# Altium PCB TB6600_Base.PcbDoc (part 3 of 4)
Units mm, origin at the board's own origin, x right, y up, seen from the top; angles counter-clockwise.
Board outline 300 x 300 mm, 2 copper layers (Top Layer, Bottom Layer); 129 components, 65 nets, 411 pads, 153 vias.
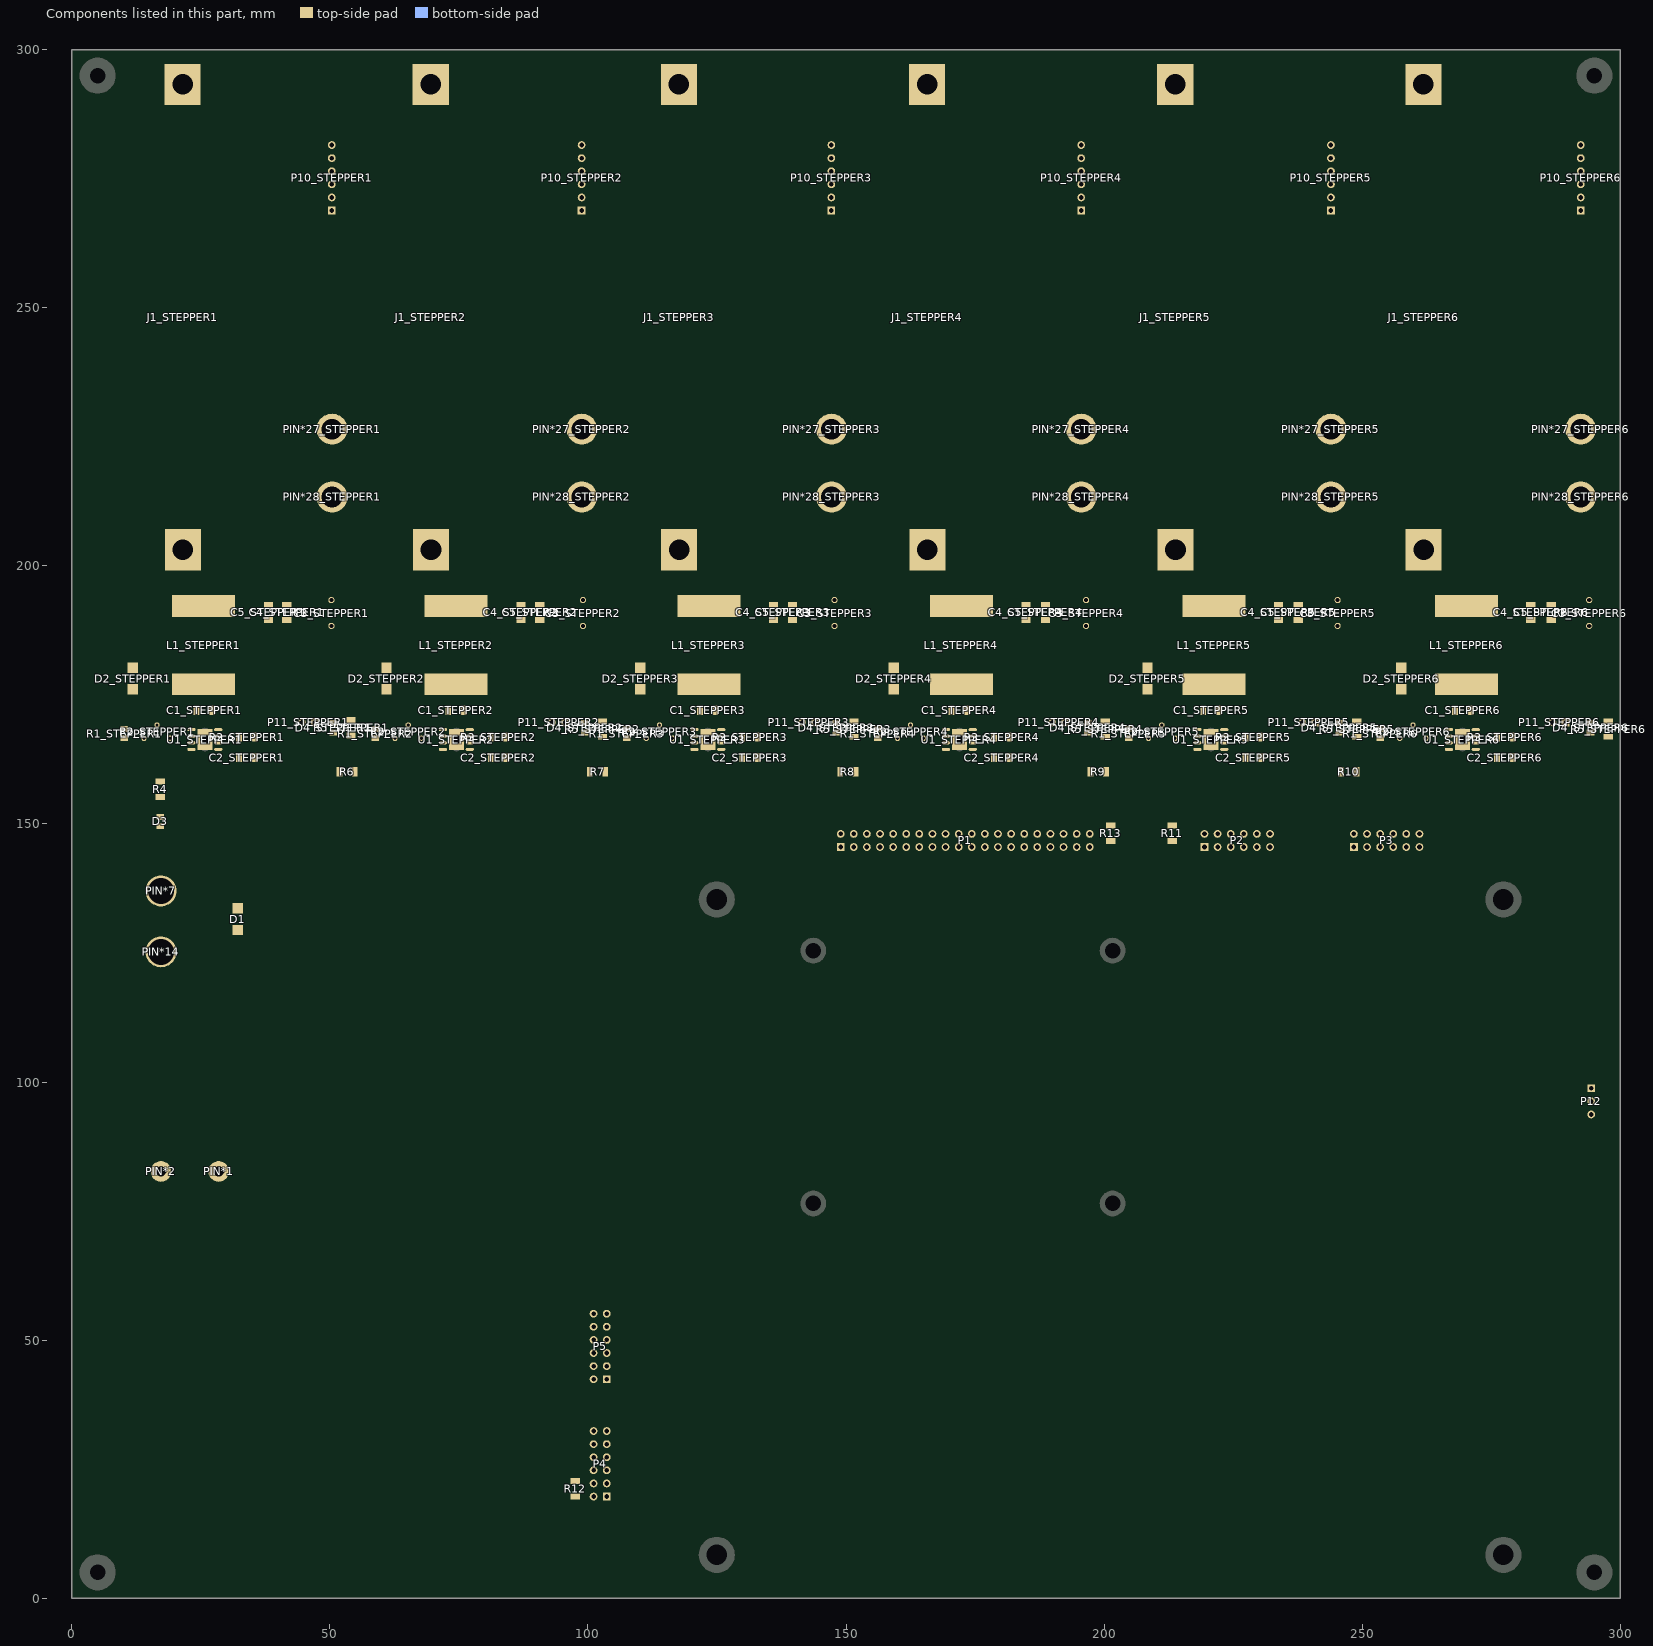
[diagram p3: the components of this part, seen from the top]

## Via types
v1: diameter 0.65, hole 0.3, Top Layer to Bottom Layer, tented both sides, 153 vias

## Nets (pads, with @x,y where several pads share a name; then routed paths per layer and width w, separated by ;. In a path a pad name is that pad's centre, name@x,y a point inside that pad or via, vN(x,y) a via of type N, cw(c..) or ccw(c..) an arc to the next point about the centre after c; other vN are vias at no path point) (continued)
copper on no net: (continued)
  Top Layer w0.254: 210.862,26.67 211.201,26.67 ; 210.862,26.924 211.201,26.924 ; 210.862,27.178 211.201,27.178 ; 210.862,27.432 210.947,27.432 ; 210.862,27.686 210.947,27.686 ; 210.862,27.94 210.947,27.94 ; 210.862,28.194 210.947,28.194 ; 210.862,28.448 210.947,28.448 ; 210.862,28.702 210.947,28.702 ; 210.862,28.956 210.947,28.956 ; 210.862,29.21 210.947,29.21 ; 210.862,29.464 210.947,29.464 ; 210.862,29.718 210.947,29.718 ; 210.862,29.972 210.947,29.972 ; 210.862,30.226 210.947,30.226 ; 210.862,30.48 210.947,30.48 ; 210.862,30.734 210.947,30.734 ; 210.862,30.988 210.947,30.988 ; 210.862,31.242 210.947,31.242 ; 210.862,31.496 210.947,31.496 ; 210.862,31.75 210.947,31.75 ; 210.862,32.004 210.947,32.004 ; 210.862,32.258 210.947,32.258 ; 210.862,32.512 210.947,32.512 ; 210.862,32.766 211.201,32.766 ; 210.862,33.02 211.201,33.02 ; 210.862,33.274 211.201,33.274 ; 211.116,25.146 211.455,25.146 ; 211.116,25.4 211.455,25.4 ; 211.116,25.654 211.201,25.654 ; 211.116,25.908 211.201,25.908 ; 211.116,26.162 211.201,26.162 ; 211.116,26.416 211.201,26.416 ; 211.116,33.528 211.201,33.528 ; 211.116,33.782 211.201,33.782 ; 211.116,34.036 211.201,34.036 ; 211.116,34.29 211.201,34.29 ; 211.116,34.544 211.455,34.544 ; 211.116,34.798 211.455,34.798 ; 211.116,35.052 211.455,35.052 ; 211.37,23.876 211.709,23.876 ; 211.37,24.13 211.709,24.13 ; 211.37,24.384 211.455,24.384 ; 211.37,24.638 211.455,24.638 ; 211.37,24.892 211.455,24.892 ; 211.37,35.306 211.455,35.306 ; 211.37,35.56 211.455,35.56 ; 211.37,35.814 211.455,35.814 ; 211.37,36.068 211.709,36.068 ; 211.37,36.322 211.709,36.322 ; 211.624,22.86 211.963,22.86 ; 211.624,23.114 211.963,23.114 ; 211.624,23.368 211.709,23.368 ; 211.624,23.622 211.709,23.622 ; 211.624,36.576 211.709,36.576 ; 211.624,36.83 211.709,36.83 ; 211.624,37.084 211.963,37.084 ; 211.624,37.338 211.963,37.338 ; 211.878,21.844 212.217,21.844 ; 211.878,22.098 212.217,22.098 ; 211.878,22.352 211.963,22.352 ; 211.878,22.606 211.963,22.606 ; 211.878,37.592 211.963,37.592 ; 211.878,37.846 211.963,37.846 ; 211.878,38.1 212.217,38.1 ; 212.132,21.082 212.471,21.082 ; 212.132,21.336 212.471,21.336 ; 212.132,21.59 212.217,21.59 ; 212.132,38.354 212.217,38.354 ; 212.132,38.608 212.217,38.608 ; 212.132,38.862 212.471,38.862 ; 212.386,20.574 212.725,20.574 ; 212.386,20.828 212.471,20.828 ; 212.386,39.116 212.471,39.116 ; 212.386,39.37 212.471,39.37 ; 212.386,39.624 212.725,39.624 ; 212.64,19.812 212.979,19.812 ; 212.64,20.066 212.725,20.066 ; 212.64,20.32 212.725,20.32 ; 212.64,29.718 212.979,29.718 ; 212.64,29.972 212.979,29.972 ; 212.64,30.226 212.725,30.226 ; 212.64,30.48 212.725,30.48 ; 212.64,30.734 212.725,30.734 ; 212.64,30.988 212.979,30.988 ; 212.64,31.242 213.233,31.242 ; 212.64,39.878 212.725,39.878 ; 212.64,40.132 212.979,40.132 ; 212.64,40.386 212.979,40.386 ; 212.894,19.05 213.233,19.05 ; 212.894,19.304 213.233,19.304 ; 212.894,19.558 212.979,19.558 ; 212.894,25.654 216.027,25.654 ; 212.894,25.908 216.027,25.908 ; 212.894,27.94 216.027,27.94 ; 212.894,29.464 215.773,29.464 ; 212.894,31.496 215.773,31.496 ; 212.894,33.274 213.487,33.274 ; 212.894,33.528 213.995,33.528 ; 212.894,35.306 213.741,35.306 ; 212.894,35.56 213.741,35.56 ; 212.894,40.64 212.979,40.64 ; 212.894,40.894 213.233,40.894 ; 213.148,18.542 213.487,18.542 ; 213.148,18.796 213.233,18.796 ; 213.148,28.194 214.757,28.194 ; 213.148,33.02 214.503,33.02 ; 213.148,41.148 213.233,41.148 ; 213.148,41.402 213.487,41.402 ; 213.402,18.034 213.741,18.034 ; 213.402,18.288 213.487,18.288 ; 213.402,24.638 214.503,24.638 ; 213.402,24.892 213.487,24.892 ; 213.402,29.21 215.773,29.21 ; 213.402,35.052 214.503,35.052 ; 213.402,41.656 213.487,41.656 ; 213.402,41.91 213.741,41.91 ; 213.402,42.164 213.741,42.164 ; 213.656,17.526 213.995,17.526 ; 213.656,17.78 213.741,17.78 ; 213.656,22.098 213.995,22.098 ; 213.656,22.352 214.503,22.352 ; 213.656,31.75 215.773,31.75 ; 213.656,35.814 214.757,35.814 ; 213.656,42.418 213.995,42.418 ; 213.656,42.672 213.995,42.672 ; 213.91,17.018 214.249,17.018 ; 213.91,17.272 213.995,17.272 ; 213.91,33.782 215.011,33.782 ; 213.91,42.926 214.249,42.926 ; 213.91,43.18 214.249,43.18 ; 214.164,16.51 214.503,16.51 ; 214.164,16.764 214.249,16.764 ; 214.164,21.082 214.503,21.082 ; 214.164,21.336 215.265,21.336 ; 214.164,22.606 214.757,22.606 ; 214.164,24.384 215.773,24.384 ; 214.164,32.766 215.519,32.766 ; 214.164,43.434 214.503,43.434 ; 214.418,16.256 214.757,16.256 ; 214.418,23.368 214.757,23.368 ; 214.418,23.622 214.757,23.622 ; 214.418,23.876 214.503,23.876 ; 214.418,24.13 214.503,24.13 ; 214.418,34.798 215.519,34.798 ; 214.418,43.688 214.503,43.688 ; 214.418,43.942 214.757,43.942 ; 214.672,15.748 215.011,15.748 ; 214.672,16.002 214.757,16.002 ; 214.672,22.86 215.265,22.86 ; 214.672,23.114 215.519,23.114 ; 214.672,26.162 214.757,26.162 ; 214.672,26.416 214.757,26.416 ; 214.672,26.67 214.757,26.67 ; 214.672,26.924 214.757,26.924 ; 214.672,27.178 214.757,27.178 ; 214.672,27.432 214.757,27.432 ; 214.672,27.686 214.757,27.686 ; 214.672,36.068 216.027,36.068 ; 214.672,44.196 214.757,44.196 ; 214.672,44.45 215.011,44.45 ; 214.926,15.24 215.265,15.24 ; 214.926,15.494 215.011,15.494 ; 214.926,19.05 215.519,19.05 ; 214.926,19.304 216.281,19.304 ; 214.926,21.59 215.773,21.59 ; 214.926,34.036 216.027,34.036 ; 214.926,44.704 215.265,44.704 ; 215.18,14.986 215.519,14.986 ; 215.18,19.558 215.519,19.558 ; 215.18,19.812 215.519,19.812 ; 215.18,28.194 215.265,28.194 ; 215.18,32.512 216.281,32.512 ; 215.18,44.958 215.265,44.958 ; 215.18,45.212 215.519,45.212 ; 215.434,14.478 215.773,14.478 ; 215.434,14.732 215.519,14.732 ; 215.434,20.066 215.773,20.066 ; 215.434,21.844 217.043,21.844 ; 215.434,23.368 216.027,23.368 ; 215.434,24.13 216.535,24.13 ; 215.434,34.544 216.027,34.544 ; 215.434,45.466 215.773,45.466 ; 215.688,14.224 216.027,14.224 ; 215.688,20.32 216.027,20.32 ; 215.688,20.574 216.027,20.574 ; 215.688,28.194 216.027,28.194 ; 215.688,34.29 216.027,34.29 ; 215.688,36.322 216.281,36.322 ; 215.688,45.72 215.773,45.72 ; 215.688,45.974 216.027,45.974 ; 215.942,13.716 216.281,13.716 ; 215.942,13.97 216.027,13.97 ; 215.942,19.558 216.789,19.558 ; 215.942,20.828 216.281,20.828 ; 215.942,23.622 216.535,23.622 ; 215.942,46.228 216.281,46.228 ; 216.196,13.462 216.535,13.462 ; 216.196,21.082 216.535,21.082 ; 216.196,22.098 217.043,22.098 ; 216.196,23.876 216.535,23.876 ; 216.196,46.482 216.281,46.482 ; 216.196,46.736 216.535,46.736 ; 216.45,13.208 216.789,13.208 ; 216.45,15.748 216.789,15.748 ; 216.45,19.812 217.551,19.812 ; 216.45,21.336 216.535,21.336 ; 216.45,21.59 216.789,21.59 ; 216.45,46.99 216.789,46.99 ; 216.704,12.954 216.789,12.954 ; 216.704,15.24 217.043,15.24 ; 216.704,15.494 216.789,15.494 ; 216.704,16.002 216.789,16.002 ; 216.704,16.256 217.043,16.256 ; 216.704,22.352 217.043,22.352 ; 216.704,47.244 217.043,47.244 ; 216.958,12.446 217.297,12.446 ; 216.958,12.7 217.043,12.7 ; 216.958,14.986 217.297,14.986 ; 216.958,16.51 217.297,16.51 ; 216.958,16.764 217.551,16.764 ; 216.958,47.498 217.043,47.498 ; 217.212,12.192 217.551,12.192 ; 217.212,14.732 218.567,14.732 ; 217.212,17.018 217.805,17.018 ; 217.212,20.066 217.805,20.066 ; 217.212,47.752 217.297,47.752 ; 217.212,48.006 217.551,48.006 ; 217.466,11.938 217.805,11.938 ; 217.466,17.272 218.059,17.272 ; 217.466,48.26 217.805,48.26 ; 217.72,11.684 218.059,11.684 ; 217.72,14.478 218.059,14.478 ; 217.72,20.32 217.805,20.32 ; 217.72,48.514 218.059,48.514 ; 217.974,11.176 218.313,11.176 ; 217.974,11.43 218.059,11.43 ; 217.974,17.526 218.313,17.526 ; 217.974,28.448 219.329,28.448 ; 217.974,28.702 219.329,28.702 ; 217.974,28.956 219.329,28.956 ; 217.974,29.21 219.329,29.21 ; 217.974,29.464 219.329,29.464 ; 217.974,29.718 219.329,29.718 ; 217.974,29.972 219.583,29.972 ; 217.974,30.226 219.583,30.226 ; 217.974,30.48 219.583,30.48 ; 217.974,30.734 219.583,30.734 ; 217.974,30.988 219.837,30.988 ; 217.974,31.242 219.837,31.242 ; 217.974,31.496 219.837,31.496 ; 217.974,31.75 219.837,31.75 ; 217.974,32.004 220.091,32.004 ; 217.974,48.768 218.313,48.768 ; 218.228,10.922 218.567,10.922 ; 218.228,17.78 218.567,17.78 ; 218.228,18.034 218.567,18.034 ; 218.228,26.416 219.329,26.416 ; 218.228,26.67 219.329,26.67 ; 218.228,26.924 219.075,26.924 ; 218.228,27.178 219.075,27.178 ; 218.228,27.432 219.329,27.432 ; 218.228,27.686 219.329,27.686 ; 218.228,27.94 219.329,27.94 ; 218.228,28.194 219.329,28.194 ; 218.228,32.258 220.091,32.258 ; 218.228,32.512 220.091,32.512 ; 218.228,32.766 220.345,32.766 ; 218.228,33.02 220.345,33.02 ; 218.228,33.274 220.345,33.274 ; 218.228,33.528 220.599,33.528 ; 218.228,33.782 220.599,33.782 ; 218.228,49.022 218.567,49.022 ; 218.482,13.208 218.821,13.208 ; 218.482,13.462 218.821,13.462 ; 218.482,14.986 218.821,14.986 ; 218.482,25.146 219.329,25.146 ; 218.482,25.4 219.329,25.4 ; 218.482,25.654 219.329,25.654 ; 218.482,25.908 219.329,25.908 ; 218.482,26.162 219.329,26.162 ; 218.482,34.036 220.853,34.036 ; 218.482,34.29 220.853,34.29 ; 218.482,34.544 221.107,34.544 ; 218.482,34.798 221.107,34.798 ; 218.482,49.276 218.821,49.276 ; 218.736,10.414 219.075,10.414 ; 218.736,10.668 218.821,10.668 ; 218.736,15.24 219.075,15.24 ; 218.736,24.13 219.583,24.13 ; 218.736,24.384 219.329,24.384 ; 218.736,24.638 219.329,24.638 ; 218.736,24.892 219.329,24.892 ; 218.736,35.052 221.361,35.052 ; 218.736,35.306 221.361,35.306 ; 218.736,35.56 221.615,35.56 ; 218.736,35.814 221.615,35.814 ; 218.736,48.514 219.329,48.514 ; 218.736,48.768 219.075,48.768 ; 218.736,49.53 219.075,49.53 ; 218.99,10.16 219.329,10.16 ; 218.99,13.716 219.329,13.716 ; 218.99,15.494 219.329,15.494 ; 218.99,23.622 219.583,23.622 ; 218.99,23.876 219.583,23.876 ; 218.99,36.068 221.869,36.068 ; 218.99,36.322 222.123,36.322 ; 218.99,36.576 222.123,36.576 ; 218.99,43.942 219.583,43.942 ; 218.99,44.196 219.583,44.196 ; 218.99,45.974 219.329,45.974 ; 218.99,48.26 219.583,48.26 ; 218.99,49.784 219.329,49.784 ; 219.244,9.906 219.583,9.906 ; 219.244,13.97 219.583,13.97 ; 219.244,15.748 219.583,15.748 ; 219.244,22.86 219.837,22.86 ; 219.244,23.114 219.837,23.114 ; 219.244,23.368 219.583,23.368 ; 219.244,36.83 222.377,36.83 ; 219.244,37.084 222.631,37.084 ; 219.244,37.338 222.631,37.338 ; 219.244,44.45 219.837,44.45 ; 219.244,44.704 219.837,44.704 ; 219.244,46.228 219.583,46.228 ; 219.244,46.482 219.583,46.482 ; 219.244,48.006 219.837,48.006 ; 219.244,50.038 219.583,50.038 ; 219.498,9.652 219.837,9.652 ; 219.498,14.224 219.837,14.224 ; 219.498,16.002 219.837,16.002 ; 219.498,22.098 220.091,22.098 ; 219.498,22.352 220.091,22.352 ; 219.498,22.606 219.837,22.606 ; 219.498,37.592 222.885,37.592 ; 219.498,37.846 223.139,37.846 ; 219.498,44.958 220.599,44.958 ; 219.498,46.736 219.583,46.736 ; 219.498,46.99 219.583,46.99 ; 219.498,47.752 219.837,47.752 ; 219.498,50.292 219.837,50.292 ; 219.752,9.398 220.091,9.398 ; 219.752,14.478 220.091,14.478 ; 219.752,16.256 220.091,16.256 ; 219.752,21.59 220.345,21.59 ; 219.752,21.844 220.091,21.844 ; 219.752,38.1 223.393,38.1 ; 219.752,38.354 223.393,38.354 ; 219.752,38.608 223.647,38.608 ; 219.752,45.212 220.091,45.212 ; 219.752,45.466 220.091,45.466 ; 219.752,47.244 220.345,47.244 ; 219.752,47.498 220.091,47.498 ; 219.752,50.546 220.091,50.546 ; 220.006,11.684 220.345,11.684 ; 220.006,11.938 220.599,11.938 ; 220.006,12.192 220.853,12.192 ; 220.006,14.732 220.853,14.732 ; 220.006,16.51 220.091,16.51 ; 220.006,21.082 220.599,21.082 ; 220.006,21.336 220.345,21.336 ; 220.006,38.862 223.901,38.862 ; 220.006,39.116 224.155,39.116 ; 220.006,45.72 220.599,45.72 ; 220.006,45.974 220.599,45.974 ; 220.006,46.99 220.853,46.99 ; 220.006,50.8 220.345,50.8 ; 220.26,9.144 220.599,9.144 ; 220.26,12.446 220.345,12.446 ; 220.26,12.7 220.345,12.7 ; 220.26,12.954 220.599,12.954 ; 220.26,13.208 220.599,13.208 ; 220.26,13.462 220.599,13.462 ; 220.26,14.986 220.853,14.986 ; 220.26,15.24 220.853,15.24 ; 220.26,20.574 220.853,20.574 ; 220.26,20.828 220.853,20.828 ; 220.26,39.37 224.409,39.37 ; 220.26,39.624 224.663,39.624 ; 220.26,41.91 220.853,41.91 ; 220.26,43.18 220.345,43.18 ; 220.26,43.434 220.599,43.434 ; 220.26,43.688 220.345,43.688 ; 220.26,43.942 220.345,43.942 ; 220.26,44.45 220.599,44.45 ; 220.26,44.704 220.599,44.704 ; 220.26,46.228 221.107,46.228 ; 220.26,46.482 220.853,46.482 ; 220.26,46.736 220.599,46.736 ; 220.26,51.054 220.599,51.054 ; 220.514,8.89 220.853,8.89 ; 220.514,13.716 220.599,13.716 ; 220.514,13.97 220.599,13.97 ; 220.514,14.224 220.599,14.224 ; 220.514,14.478 220.853,14.478 ; 220.514,20.066 221.361,20.066 ; 220.514,20.32 221.107,20.32 ; 220.514,39.878 224.917,39.878 ; 220.514,40.132 225.171,40.132 ; 220.514,42.164 220.853,42.164 ; 220.514,42.418 221.107,42.418 ; 220.514,44.196 220.599,44.196 ; 220.514,45.466 220.853,45.466 ; 220.514,48.26 221.107,48.26 ; 220.514,48.514 220.853,48.514 ; 220.514,51.308 220.853,51.308 ; 220.768,8.636 221.107,8.636 ; 220.768,12.446 221.107,12.446 ; 220.768,15.494 220.853,15.494 ; 220.768,19.558 221.869,19.558 ; 220.768,19.812 221.615,19.812 ; 220.768,40.386 225.425,40.386 ; 220.768,42.672 221.107,42.672 ; 220.768,42.926 221.107,42.926 ; 220.768,45.212 222.885,45.212 ; 220.768,48.006 221.107,48.006 ; 220.768,51.562 221.361,51.562 ; 221.022,8.382 221.361,8.382 ; 221.022,12.7 221.361,12.7 ; 221.022,19.05 222.631,19.05 ; 221.022,19.304 222.123,19.304 ; 221.022,40.64 225.679,40.64 ; 221.022,40.894 225.933,40.894 ; 221.022,43.18 221.361,43.18 ; 221.022,43.434 221.361,43.434 ; 221.022,43.688 221.361,43.688 ; 221.022,44.958 221.615,44.958 ; 221.022,45.974 221.107,45.974 ; 221.022,47.752 221.107,47.752 ; 221.276,8.128 221.869,8.128 ; 221.276,10.414 221.615,10.414 ; 221.276,10.668 221.869,10.668 ; 221.276,12.954 221.615,12.954 ; 221.276,18.796 222.885,18.796 ; 221.276,41.148 226.187,41.148 ; 221.276,41.402 226.695,41.402 ; 221.276,43.942 221.361,43.942 ; 221.276,44.196 221.361,44.196 ; 221.276,44.45 221.615,44.45 ; 221.276,44.704 221.361,44.704 ; 221.276,45.466 221.869,45.466 ; 221.276,45.72 221.615,45.72 ; 221.276,51.816 221.615,51.816 ; 221.53,13.208 221.869,13.208 ; 221.53,18.542 223.647,18.542 ; 221.53,41.656 226.949,41.656 ; 221.53,52.07 221.869,52.07 ; 221.784,7.874 222.123,7.874 ; 221.784,10.922 222.123,10.922 ; 221.784,13.462 222.123,13.462 ; 221.784,18.034 225.933,18.034 ; 221.784,18.288 224.409,18.288 ; 221.784,41.91 227.203,41.91 ; 221.784,52.324 222.377,52.324 ; 222.038,7.62 222.377,7.62 ; 222.038,11.176 222.377,11.176 ; 222.038,11.43 222.377,11.43 ; 222.038,13.716 222.377,13.716 ; 222.038,17.78 245.999,17.78 ; 222.038,42.164 227.711,42.164 ; 222.038,42.418 228.219,42.418 ; 222.038,46.228 222.123,46.228 ; 222.292,7.366 222.885,7.366 ; 222.292,11.684 222.885,11.684 ; 222.292,13.97 222.377,13.97 ; 222.292,17.526 245.999,17.526 ; 222.292,42.672 228.473,42.672 ; 222.292,44.958 223.139,44.958 ; 222.292,45.466 222.885,45.466 ; 222.292,45.72 222.631,45.72 ; 222.292,45.974 222.377,45.974 ; 222.292,52.578 222.631,52.578 ; 222.546,11.938 223.139,11.938 ; 222.546,17.018 245.745,17.018 ; 222.546,17.272 245.745,17.272 ; 222.546,42.926 236.347,42.926 ; 222.546,44.704 223.139,44.704 ; 222.546,52.832 222.885,52.832 ; 222.8,7.112 223.139,7.112 ; 222.8,8.89 223.647,8.89 ; 222.8,16.764 245.491,16.764 ; 222.8,43.18 236.855,43.18 ; 222.8,43.434 237.109,43.434 ; 222.8,44.45 223.139,44.45 ; 222.8,53.086 223.393,53.086 ; 223.054,6.858 223.647,6.858 ; 223.054,8.636 223.139,8.636 ; 223.054,9.144 223.139,9.144 ; 223.054,9.398 223.139,9.398 ; 223.054,9.652 223.393,9.652 ; 223.054,12.192 223.393,12.192 ; 223.054,16.51 245.491,16.51 ; 223.054,43.688 237.363,43.688 ; 223.308,9.906 223.393,9.906 ; 223.308,10.16 223.393,10.16 ; 223.308,10.414 223.647,10.414 ; 223.308,12.446 223.647,12.446 ; 223.308,12.7 223.647,12.7 ; 223.308,16.256 245.237,16.256 ; 223.308,43.942 237.617,43.942 ; 223.308,53.34 223.647,53.34 ; 223.562,6.604 223.901,6.604 ; 223.562,9.144 224.155,9.144 ; 223.562,10.668 223.647,10.668 ; 223.562,10.922 223.901,10.922 ; 223.562,11.176 223.901,11.176 ; 223.562,16.002 244.983,16.002 ; 223.562,44.196 238.125,44.196 ; 223.562,53.594 224.155,53.594 ; 223.816,6.35 224.409,6.35 ; 223.816,11.43 223.901,11.43 ; 223.816,11.684 224.155,11.684 ; 223.816,15.748 244.729,15.748 ; 223.816,44.45 238.379,44.45 ; 224.07,9.398 224.663,9.398 ; 224.07,11.938 224.155,11.938 ; 224.07,15.494 244.729,15.494 ; 224.07,44.704 238.887,44.704 ; 224.07,53.848 224.663,53.848 ; 224.324,6.096 224.917,6.096 ; 224.324,15.24 244.475,15.24 ; 224.324,44.958 239.141,44.958 ; 224.578,9.652 224.917,9.652 ; 224.578,14.986 244.221,14.986 ; 224.578,45.212 239.649,45.212 ; 224.578,54.102 224.917,54.102 ; 224.832,5.842 225.171,5.842 ; 224.832,7.366 225.171,7.366 ; 224.832,7.62 225.171,7.62 ; 224.832,9.906 225.425,9.906 ; 224.832,14.732 244.221,14.732 ; 224.832,45.466 239.903,45.466 ; 224.832,54.356 225.425,54.356 ; 225.086,7.112 225.425,7.112 ; 225.086,7.874 225.425,7.874 ; 225.086,14.478 243.967,14.478 ; 225.086,45.72 240.411,45.72 ; 225.086,52.578 225.425,52.578 ; 225.086,52.832 225.425,52.832 ; 225.086,53.086 225.171,53.086 ; 225.34,5.588 225.679,5.588 ; 225.34,6.858 225.679,6.858 ; 225.34,8.128 225.679,8.128 ; 225.34,10.16 225.933,10.16 ; 225.34,14.224 243.713,14.224 ; 225.34,51.816 225.425,51.816 ; 225.34,52.07 225.679,52.07 ; 225.34,52.324 225.425,52.324 ; 225.34,54.61 225.933,54.61 ; 225.594,5.334 226.187,5.334 ; 225.594,6.604 226.187,6.604 ; 225.594,8.382 226.187,8.382 ; 225.594,8.636 226.187,8.636 ; 225.594,13.97 243.459,13.97 ; 225.594,45.974 240.919,45.974 ; 225.594,51.054 226.187,51.054 ; 225.848,8.89 226.187,8.89 ; 225.848,10.414 225.933,10.414 ; 225.848,13.716 243.459,13.716 ; 225.848,28.448 228.473,28.448 ; 225.848,28.702 228.473,28.702 ; 225.848,28.956 228.473,28.956 ; 225.848,29.21 228.473,29.21 ; 225.848,29.464 228.473,29.464 ; 225.848,29.718 228.727,29.718 ; 225.848,29.972 228.727,29.972 ; 225.848,30.226 228.727,30.226 ; 225.848,30.48 228.727,30.48 ; 225.848,30.734 228.727,30.734 ; 225.848,30.988 228.727,30.988 ; 225.848,31.242 228.727,31.242 ; 225.848,31.496 228.981,31.496 ; 225.848,31.75 228.981,31.75 ; 225.848,32.004 228.981,32.004 ; 225.848,32.258 228.981,32.258 ; 225.848,32.512 229.235,32.512 ; 225.848,32.766 229.235,32.766 ; 225.848,33.02 229.235,33.02 ; 225.848,33.274 229.489,33.274 ; 225.848,33.528 229.489,33.528 ; 225.848,33.782 229.489,33.782 ; 225.848,46.228 241.427,46.228 ; 225.848,50.546 226.441,50.546 ; 225.848,50.8 226.441,50.8 ; 225.848,51.308 225.933,51.308 ; 225.848,54.864 226.441,54.864 ; 226.102,5.08 226.695,5.08 ; 226.102,6.35 226.441,6.35 ; 226.102,9.144 226.441,9.144 ; 226.102,27.432 228.727,27.432 ; 226.102,27.686 228.473,27.686 ; 226.102,27.94 228.473,27.94 ; 226.102,28.194 228.473,28.194 ; 226.102,34.036 229.743,34.036 ; 226.102,34.29 229.743,34.29 ; 226.102,34.544 229.997,34.544 ; 226.102,34.798 229.997,34.798 ; 226.102,35.052 230.251,35.052 ; 226.102,35.306 230.251,35.306 ; 226.102,46.482 241.935,46.482 ; 226.102,49.276 226.695,49.276 ; 226.102,49.53 226.441,49.53 ; 226.102,49.784 226.441,49.784 ; 226.102,50.038 226.441,50.038 ; 226.102,50.292 226.441,50.292 ; 226.356,6.096 226.695,6.096 ; 226.356,8.128 226.695,8.128 ; 226.356,9.398 227.457,9.398 ; 226.356,9.652 226.949,9.652 ; 226.356,13.462 243.205,13.462 ; 226.356,26.416 228.727,26.416 ; 226.356,26.67 228.727,26.67 ; 226.356,26.924 228.727,26.924 ; 226.356,27.178 228.727,27.178 ; 226.356,35.56 230.505,35.56 ; 226.356,35.814 230.505,35.814 ; 226.356,36.068 230.759,36.068 ; 226.356,36.322 230.759,36.322 ; 226.356,46.736 242.443,46.736 ; 226.356,48.006 226.695,48.006 ; 226.356,48.26 226.695,48.26 ; 226.356,48.514 226.695,48.514 ; 226.356,48.768 226.695,48.768 ; 226.356,49.022 226.695,49.022 ; 226.356,52.07 226.949,52.07 ; 226.356,55.118 226.949,55.118 ; 226.61,4.826 227.203,4.826 ; 226.61,7.874 226.949,7.874 ; 226.61,9.906 226.695,9.906 ; 226.61,13.208 242.951,13.208 ; 226.61,25.908 228.727,25.908 ; 226.61,26.162 228.727,26.162 ; 226.61,36.576 231.013,36.576 ; 226.61,36.83 231.013,36.83 ; 226.61,37.084 231.267,37.084 ; 226.61,37.338 231.267,37.338 ; 226.61,52.324 226.949,52.324 ; 226.864,7.62 227.203,7.62 ; 226.864,25.4 228.981,25.4 ; 226.864,25.654 228.981,25.654 ; 226.864,37.592 231.521,37.592 ; 226.864,37.846 231.775,37.846 ; 226.864,38.1 232.029,38.1 ; 226.864,46.99 242.951,46.99 ; 226.864,52.578 227.965,52.578 ; 226.864,52.832 227.711,52.832 ; 226.864,53.086 227.457,53.086 ; 226.864,53.34 227.457,53.34 ; 226.864,53.594 227.457,53.594 ; 226.864,53.848 227.711,53.848 ; 226.864,55.372 227.457,55.372 ; 227.118,4.572 227.965,4.572 ; 227.118,7.366 227.457,7.366 ; 227.118,12.954 242.697,12.954 ; 227.118,24.892 229.235,24.892 ; 227.118,25.146 228.981,25.146 ; 227.118,38.354 232.029,38.354 ; 227.118,38.608 232.283,38.608 ; 227.118,38.862 232.537,38.862 ; 227.118,47.244 243.459,47.244 ; 227.118,50.546 227.457,50.546 ; 227.118,50.8 228.727,50.8 ; 227.118,51.308 228.219,51.308 ; 227.118,51.562 227.457,51.562 ; 227.118,51.816 228.219,51.816 ; 227.372,9.144 227.711,9.144 ; 227.372,12.7 242.697,12.7 ; 227.372,24.384 229.235,24.384 ; 227.372,24.638 229.235,24.638 ; 227.372,39.116 232.537,39.116 ; 227.372,39.37 232.791,39.37 ; 227.372,51.054 227.457,51.054 ; 227.372,52.07 227.965,52.07 ; 227.372,52.324 227.965,52.324 ; 227.372,54.102 227.457,54.102 ; 227.372,54.356 227.457,54.356 ; 227.372,54.61 227.457,54.61 ; 227.372,55.626 228.219,55.626 ; 227.626,8.89 227.965,8.89 ; 227.626,24.13 229.489,24.13 ; 227.626,39.624 233.045,39.624 ; 227.626,39.878 233.299,39.878 ; 227.626,47.498 243.967,47.498 ; 227.88,4.318 228.473,4.318 ; 227.88,5.334 227.965,5.334 ; 227.88,5.588 228.219,5.588 ; 227.88,5.842 228.219,5.842 ; 227.88,8.636 228.219,8.636 ; 227.88,12.446 249.555,12.446 ; 227.88,23.622 229.743,23.622 ; 227.88,23.876 229.743,23.876 ; 227.88,40.132 233.553,40.132 ; 227.88,40.386 233.807,40.386 ; 227.88,40.64 234.061,40.64 ; 227.88,47.752 244.475,47.752 ; 227.88,49.276 228.219,49.276 ; 227.88,50.038 228.219,50.038 ; 227.88,50.292 228.473,50.292 ; 227.88,51.054 228.981,51.054 ; 227.88,51.562 228.219,51.562 ; 228.134,6.096 228.219,6.096 ; 228.134,6.35 228.473,6.35 ; 228.134,12.192 249.047,12.192 ; 228.134,18.034 246.253,18.034 ; 228.134,23.368 229.997,23.368 ; 228.134,40.894 234.315,40.894 ; 228.134,41.148 234.569,41.148 ; 228.134,49.53 228.219,49.53 ; 228.134,49.784 228.219,49.784 ; 228.134,50.546 228.727,50.546 ; 228.134,55.88 228.727,55.88 ; 228.388,4.064 229.235,4.064 ; 228.388,6.604 229.489,6.604 ; 228.388,6.858 228.981,6.858 ; 228.388,7.112 228.727,7.112 ; 228.388,8.382 228.473,8.382 ; 228.388,23.114 230.251,23.114 ; 228.388,41.402 234.823,41.402 ; 228.388,48.006 249.047,48.006 ; 228.642,7.366 228.727,7.366 ; 228.642,7.62 228.981,7.62 ; 228.642,11.938 248.539,11.938 ; 228.642,22.86 230.505,22.86 ; 228.642,41.656 235.077,41.656 ; 228.642,41.91 235.331,41.91 ; 228.642,56.134 229.489,56.134 ; 228.896,3.81 229.997,3.81 ; 228.896,7.874 228.981,7.874 ; 228.896,8.128 229.743,8.128 ; 228.896,22.606 230.759,22.606 ; 228.896,42.164 235.585,42.164 ; 228.896,42.418 235.839,42.418 ; 228.896,48.26 248.539,48.26 ; 228.896,49.276 229.235,49.276 ; 228.896,49.53 229.489,49.53 ; 228.896,49.784 229.235,49.784 ; 228.896,50.038 228.981,50.038 ; 229.15,8.382 229.235,8.382 ; 229.15,11.684 248.285,11.684 ; 229.15,42.672 236.093,42.672 ; 229.15,56.388 230.251,56.388 ; 229.404,6.35 230.759,6.35 ; 229.404,22.352 231.013,22.352 ; 229.404,48.514 248.031,48.514 ; 229.658,3.556 230.759,3.556 ; 229.658,5.588 229.997,5.588 ; 229.658,5.842 229.997,5.842 ; 229.658,6.096 230.251,6.096 ; 229.658,7.874 230.251,7.874 ; 229.658,11.43 247.777,11.43 ; 229.658,22.098 231.521,22.098 ; 229.912,4.572 230.251,4.572 ; 229.912,4.826 230.251,4.826 ; 229.912,5.08 230.251,5.08 ; 229.912,5.334 229.997,5.334 ; 229.912,18.288 246.507,18.288 ; 229.912,48.768 247.523,48.768 ; 230.166,7.62 230.759,7.62 ; 230.166,11.176 247.269,11.176 ; 230.166,21.844 232.283,21.844 ; 230.166,56.642 231.013,56.642 ; 230.42,49.022 247.015,49.022 ; 230.674,3.302 231.521,3.302 ; 230.674,6.604 231.013,6.604 ; 230.674,7.366 231.013,7.366 ; 230.674,10.922 246.507,10.922 ; 230.674,21.59 232.791,21.59 ; 230.928,6.858 231.013,6.858 ; 230.928,7.112 231.013,7.112 ; 230.928,49.276 246.253,49.276 ; 230.928,56.896 232.029,56.896 ; 231.182,18.542 246.507,18.542 ; 231.182,21.336 234.315,21.336 ; 231.436,3.048 232.791,3.048 ; 231.436,4.826 231.775,4.826 ; 231.436,10.668 245.999,10.668 ; 231.69,4.318 232.283,4.318 ; 231.69,4.572 232.029,4.572 ; 231.69,6.096 232.283,6.096 ; 231.69,6.35 231.775,6.35 ; 231.69,6.604 231.775,6.604 ; 231.69,6.858 232.029,6.858 ; 231.69,49.53 245.745,49.53 ; 231.944,5.842 233.045,5.842 ; 231.944,7.112 233.553,7.112 ; 231.944,10.414 245.237,10.414 ; 231.944,18.796 246.761,18.796 ; 231.944,57.15 233.299,57.15 ; 232.198,4.064 233.299,4.064 ; 232.198,21.082 235.585,21.082 ; 232.198,49.784 244.983,49.784 ; 232.452,2.794 234.061,2.794 ; 232.706,5.588 233.807,5.588 ; 232.706,7.366 233.045,7.366 ; 232.706,19.05 246.761,19.05 ; 232.96,10.16 244.475,10.16 ; 232.96,57.404 234.823,57.404 ; 233.214,4.318 233.807,4.318 ; 233.214,19.304 247.015,19.304 ; 233.214,50.038 243.967,50.038 ; 233.214,54.61 234.315,54.61 ; 233.468,5.334 233.807,5.334 ; 233.468,6.858 233.807,6.858 ; 233.468,52.832 234.569,52.832 ; 233.468,54.864 234.569,54.864 ; 233.722,2.54 236.347,2.54 ; 233.722,4.572 234.061,4.572 ; 233.722,4.826 234.061,4.826 ; 233.722,5.08 234.061,5.08 ; 233.722,6.604 233.807,6.604 ; 233.722,9.906 243.459,9.906 ; 233.722,51.562 234.315,51.562 ; 233.722,51.816 234.315,51.816 ; 233.722,52.07 234.315,52.07 ; 233.722,53.086 234.823,53.086 ; 233.722,55.118 234.569,55.118 ; 233.976,19.558 247.015,19.558 ; 233.976,51.308 234.061,51.308 ; 233.976,52.324 234.315,52.324 ; 233.976,52.578 234.315,52.578 ; 233.976,53.34 234.315,53.34 ; 234.23,50.292 243.205,50.292 ; 234.23,53.594 234.315,53.594 ; 234.23,53.848 234.315,53.848 ; 234.23,54.102 234.315,54.102 ; 234.23,54.356 234.315,54.356 ; 234.23,55.372 234.315,55.372 ; 234.23,57.658 237.871,57.658 ; 234.484,19.812 247.015,19.812 ; 234.992,9.652 242.443,9.652 ; 234.992,20.066 247.269,20.066 ; 234.992,54.356 235.331,54.356 ; 234.992,54.61 236.601,54.61 ; 234.992,54.864 235.331,54.864 ; 234.992,55.118 235.331,55.118 ; 234.992,55.372 235.077,55.372 ; 235.246,2.286 241.935,2.286 ; 235.246,52.324 236.093,52.324 ; 235.246,52.578 236.347,52.578 ; 235.5,3.556 235.585,3.556 ; 235.5,3.81 235.585,3.81 ; 235.5,4.064 235.585,4.064 ; 235.5,4.318 235.585,4.318 ; 235.5,4.572 235.585,4.572 ; 235.5,4.826 235.585,4.826 ; 235.5,5.08 235.585,5.08 ; 235.5,5.334 235.585,5.334 ; 235.5,5.588 235.585,5.588 ; 235.5,5.842 235.585,5.842 ; 235.5,6.096 235.585,6.096 ; 235.5,6.35 235.585,6.35 ; 235.5,6.604 235.585,6.604 ; 235.5,6.858 235.585,6.858 ; 235.5,20.32 247.269,20.32 ; 235.5,51.308 236.855,51.308 ; 235.5,51.562 237.109,51.562 ; 235.5,51.816 236.093,51.816 ; 235.5,52.07 236.093,52.07 ; 235.5,52.832 236.347,52.832 ; 235.5,55.626 236.093,55.626 ; 235.754,50.546 241.681,50.546 ; 235.754,53.086 236.347,53.086 ; 235.754,53.34 235.839,53.34 ; 235.754,53.594 235.839,53.594 ; 235.754,53.848 236.093,53.848 ; 235.754,54.102 236.347,54.102 ; 235.754,54.356 236.601,54.356 ; 235.754,55.88 236.347,55.88 ; 236.008,20.574 247.523,20.574 ; 236.008,54.864 236.855,54.864 ; 236.008,55.118 236.093,55.118 ; 236.008,55.372 236.093,55.372 ; 236.008,56.134 237.363,56.134 ; 236.262,57.912 240.919,57.912 ; 236.516,6.858 239.141,6.858 ; 236.516,20.828 247.523,20.828 ; 236.516,51.816 237.109,51.816 ; 236.516,56.388 237.363,56.388 ; 236.77,6.604 238.125,6.604 ; 236.77,9.398 240.411,9.398 ; 236.77,21.082 247.523,21.082 ; 236.77,55.118 236.855,55.118 ; 236.77,55.372 236.855,55.372 ; 236.77,55.626 237.109,55.626 ; 236.77,55.88 237.363,55.88 ; 236.77,56.642 237.109,56.642 ; 237.024,31.496 239.141,31.496 ; 237.024,31.75 239.141,31.75 ; 237.024,32.004 239.395,32.004 ; 237.024,32.258 239.649,32.258 ; 237.024,32.512 239.903,32.512 ; 237.024,32.766 240.157,32.766 ; 237.024,33.02 240.411,33.02 ; 237.024,33.274 240.665,33.274 ; 237.024,33.528 240.919,33.528 ; 237.024,33.782 241.173,33.782 ; 237.024,34.036 241.427,34.036 ; 237.024,34.29 241.681,34.29 ; 237.024,34.544 242.189,34.544 ; 237.024,34.798 242.443,34.798 ; 237.278,30.48 245.745,30.48 ; 237.278,30.734 245.237,30.734 ; 237.278,30.988 238.633,30.988 ; 237.278,31.242 238.887,31.242 ; 237.278,35.052 242.697,35.052 ; 237.278,35.306 243.205,35.306 ; 237.278,35.56 243.459,35.56 ; 237.278,35.814 243.967,35.814 ; 237.278,36.068 244.475,36.068 ; 237.532,21.336 247.777,21.336 ; 237.532,29.718 246.761,29.718 ; 237.532,29.972 246.507,29.972 ; 237.532,30.226 245.999,30.226 ; 237.532,36.322 244.729,36.322 ; 237.532,36.576 245.237,36.576 ; 237.532,36.83 245.745,36.83 ; 237.786,3.81 237.871,3.81 ; 237.786,4.064 237.871,4.064 ; 237.786,4.318 237.871,4.318 ; 237.786,4.572 237.871,4.572 ; 237.786,4.826 237.871,4.826 ; 237.786,5.08 237.871,5.08 ; 237.786,5.334 237.871,5.334 ; 237.786,5.588 237.871,5.588 ; 237.786,5.842 237.871,5.842 ; 237.786,6.096 237.871,6.096 ; 237.786,6.35 237.871,6.35 ; 237.786,29.21 247.269,29.21 ; 237.786,29.464 247.015,29.464 ; 237.786,37.084 246.253,37.084 ; 237.786,37.338 247.015,37.338 ; 237.786,37.592 247.523,37.592 ; 237.786,37.846 248.285,37.846 ; 238.04,28.702 247.523,28.702 ; 238.04,28.956 247.269,28.956 ; 238.04,38.1 249.301,38.1 ; 238.04,38.354 250.571,38.354 ; 238.294,28.448 247.777,28.448 ; 238.294,38.608 257.429,38.608 ; 238.294,38.862 257.429,38.862 ; 238.294,39.116 257.175,39.116 ; 238.294,57.658 238.633,57.658 ; 238.548,27.94 248.031,27.94 ; 238.548,28.194 247.777,28.194 ; 238.548,39.37 257.175,39.37 ; 238.548,39.624 256.921,39.624 ; 238.802,6.604 238.887,6.604 ; 238.802,27.686 248.031,27.686 ; 238.802,39.878 256.921,39.878 ; 238.802,40.132 256.667,40.132 ; 239.056,27.432 248.031,27.432 ; 239.056,40.386 256.413,40.386 ; 239.056,40.64 256.413,40.64 ; 239.056,57.658 242.951,57.658 ; 239.31,21.59 247.777,21.59 ; 239.31,27.178 248.285,27.178 ; 239.31,40.894 256.159,40.894 ; 239.31,41.148 256.159,41.148 ; 239.564,41.402 255.905,41.402 ; 239.564,41.656 255.651,41.656 ; 239.818,26.924 248.285,26.924 ; 239.818,41.91 255.651,41.91 ; 240.072,6.35 240.411,6.35 ; 240.072,6.604 240.411,6.604 ; 240.072,26.67 248.285,26.67 ; 240.072,30.988 244.221,30.988 ; 240.072,42.164 255.397,42.164 ; 240.072,42.418 255.143,42.418 ; 240.072,52.324 242.951,52.324 ; 240.072,52.578 244.475,52.578 ; 240.326,6.096 240.665,6.096 ; 240.326,26.416 248.285,26.416 ; 240.326,42.672 254.889,42.672 ; 240.326,51.816 240.665,51.816 ; 240.326,52.07 241.681,52.07 ; 240.58,5.842 240.919,5.842 ; 240.58,21.844 247.777,21.844 ; 240.58,42.926 254.889,42.926 ; 240.58,43.18 254.635,43.18 ; 240.834,5.334 241.173,5.334 ; 240.834,5.588 240.919,5.588 ; 240.834,26.162 248.285,26.162 ; 240.834,43.434 254.381,43.434 ; 241.088,2.54 243.713,2.54 ; 241.088,5.08 241.681,5.08 ; 241.088,43.688 254.127,43.688 ; 241.342,3.556 241.427,3.556 ; 241.342,3.81 241.427,3.81 ; 241.342,4.064 241.427,4.064 ; 241.342,4.318 241.427,4.318 ; 241.342,4.572 241.427,4.572 ; 241.342,4.826 241.427,4.826 ; 241.342,25.908 248.285,25.908 ; 241.342,43.942 253.873,43.942 ; 241.342,44.196 253.619,44.196 ; 241.596,5.334 241.935,5.334 ; 241.596,22.098 248.031,22.098 ; 241.596,44.45 253.619,44.45 ; 241.85,5.588 241.935,5.588 ; 241.85,44.704 253.111,44.704 ; 241.85,52.832 243.205,52.832 ; 242.104,5.842 242.189,5.842 ; 242.104,6.096 242.443,6.096 ; 242.104,25.654 248.285,25.654 ; 242.104,31.242 242.443,31.242 ; 242.104,44.958 253.111,44.958 ; 242.104,55.118 243.713,55.118 ; 242.358,6.35 242.697,6.35 ; 242.358,6.604 242.697,6.604 ; 242.358,22.352 248.031,22.352 ; 242.358,45.212 252.603,45.212 ; 242.358,53.086 242.951,53.086 ; 242.358,54.61 243.459,54.61 ; 242.358,54.864 244.729,54.864 ; 242.358,57.404 244.475,57.404 ; 242.612,45.466 252.349,45.466 ; 242.612,53.34 243.205,53.34 ; 242.866,25.4 248.285,25.4 ; 242.866,45.72 252.095,45.72 ; 243.12,2.794 244.729,2.794 ; 243.12,12.7 249.809,12.7 ; 243.12,45.974 251.841,45.974 ; 243.12,53.594 243.459,53.594 ; 243.374,22.606 248.031,22.606 ; 243.374,46.228 251.587,46.228 ; 243.374,52.324 244.221,52.324 ; 243.374,53.848 243.713,53.848 ; 243.628,46.482 251.333,46.482 ; 243.628,54.102 244.221,54.102 ; 243.882,12.954 250.317,12.954 ; 243.882,25.146 248.285,25.146 ; 243.882,46.736 250.825,46.736 ; 243.882,54.356 244.729,54.356 ; 243.882,57.15 245.491,57.15 ; 244.136,22.86 248.031,22.86 ; 244.136,46.99 250.571,46.99 ; 244.136,52.832 244.221,52.832 ; 244.136,54.61 244.729,54.61 ; 244.39,3.048 245.745,3.048 ; 244.644,5.842 244.983,5.842 ; 244.644,6.096 244.983,6.096 ; 244.644,6.35 244.983,6.35 ; 244.644,6.604 244.983,6.604 ; 244.644,13.208 250.571,13.208 ; 244.644,47.244 250.063,47.244 ; 244.898,5.08 245.237,5.08 ; 244.898,5.334 245.237,5.334 ; 244.898,5.588 244.983,5.588 ; 244.898,6.858 244.983,6.858 ; 244.898,7.112 245.237,7.112 ; 244.898,23.114 248.285,23.114 ; 244.898,47.498 249.809,47.498 ; 245.152,4.826 245.745,4.826 ; 245.152,7.366 245.491,7.366 ; 245.152,13.462 251.079,13.462 ; 245.152,56.896 246.507,56.896 ; 245.406,7.62 247.015,7.62 ; 245.406,23.368 248.285,23.368 ; 245.406,47.752 249.301,47.752 ; 245.66,3.302 246.761,3.302 ; 245.66,4.572 247.015,4.572 ; 245.66,13.716 251.333,13.716 ; 245.914,7.874 246.507,7.874 ; 245.914,23.622 248.285,23.622 ; 246.168,13.97 251.587,13.97 ; 246.168,56.642 247.269,56.642 ; 246.676,3.556 247.523,3.556 ; 246.676,4.826 247.269,4.826 ; 246.676,14.224 251.841,14.224 ; 246.676,23.876 248.285,23.876 ; 246.93,7.366 247.269,7.366 ; 246.93,56.388 248.031,56.388 ; 247.184,5.08 247.523,5.08 ; 247.184,7.112 247.523,7.112 ; 247.184,14.478 252.349,14.478 ; 247.184,24.13 248.285,24.13 ; 247.184,24.892 247.269,24.892 ; 247.438,3.81 248.285,3.81 ; 247.438,5.334 247.523,5.334 ; 247.438,5.588 247.777,5.588 ; 247.438,5.842 247.777,5.842 ; 247.438,6.096 247.777,6.096 ; 247.438,6.35 247.777,6.35 ; 247.438,6.604 247.777,6.604 ; 247.438,6.858 247.777,6.858 ; 247.692,14.732 252.603,14.732 ; 247.692,24.384 248.285,24.384 ; 247.946,14.986 252.857,14.986 ; 247.946,49.276 248.793,49.276 ; 247.946,56.134 248.793,56.134 ; 248.2,4.064 248.793,4.064 ; 248.2,8.382 248.539,8.382 ; 248.2,8.636 249.047,8.636 ; 248.2,24.638 248.285,24.638 ; 248.2,24.892 248.285,24.892 ; 248.2,49.53 249.301,49.53 ; 248.454,7.874 248.793,7.874 ; 248.454,8.128 248.539,8.128 ; 248.454,15.24 253.111,15.24 ; 248.454,50.546 250.317,50.546 ; 248.454,50.8 250.571,50.8 ; 248.454,55.88 249.301,55.88 ; 248.708,4.318 249.555,4.318 ; 248.708,7.112 249.047,7.112 ; 248.708,7.366 249.809,7.366 ; 248.708,7.62 248.793,7.62 ; 248.708,15.494 253.365,15.494 ; 248.708,50.292 249.047,50.292 ; 248.962,6.35 249.301,6.35 ; 248.962,6.604 249.301,6.604 ; 248.962,6.858 249.047,6.858 ; 248.962,8.89 249.555,8.89 ; 249.216,5.842 249.555,5.842 ; 249.216,6.096 249.555,6.096 ; 249.216,15.748 253.619,15.748 ; 249.216,49.784 249.555,49.784 ; 249.216,55.626 249.809,55.626 ; 249.47,4.572 250.063,4.572 ; 249.47,5.588 249.555,5.588 ; 249.47,7.62 250.317,7.62 ; 249.47,9.144 250.317,9.144 ; 249.47,16.002 253.873,16.002 ; 249.47,50.038 249.809,50.038 ; 249.724,16.256 254.127,16.256 ; 249.724,50.292 250.317,50.292 ; 249.724,51.054 251.841,51.054 ; 249.724,55.372 250.571,55.372 ; 249.978,4.826 250.571,4.826 ; 249.978,16.51 254.381,16.51 ; 250.232,7.874 250.571,7.874 ; 250.232,16.764 254.635,16.764 ; 250.232,48.768 250.825,48.768 ; 250.232,49.53 250.571,49.53 ; 250.232,49.784 250.317,49.784 ; 250.232,51.308 251.841,51.308 ; 250.232,55.118 250.825,55.118 ; 250.486,5.08 251.333,5.08 ; 250.486,48.006 251.587,48.006 ; 250.486,48.26 251.333,48.26 ; 250.486,48.514 250.825,48.514 ; 250.486,49.022 250.571,49.022 ; 250.486,49.276 250.571,49.276 ; 250.486,51.562 251.079,51.562 ; 250.486,51.816 251.079,51.816 ; 250.74,17.018 254.635,17.018 ; 250.74,52.07 251.079,52.07 ; 250.74,52.324 251.333,52.324 ; 250.74,52.578 251.587,52.578 ; 250.74,54.864 251.587,54.864 ; 250.994,5.334 251.587,5.334 ; 250.994,9.906 251.079,9.906 ; 250.994,10.16 251.587,10.16 ; 250.994,17.272 254.889,17.272 ; 250.994,52.832 251.587,52.832 ; 250.994,53.086 251.587,53.086 ; 250.994,53.34 251.587,53.34 ; 251.248,17.526 255.143,17.526 ; 251.248,53.594 251.333,53.594 ; 251.248,54.61 251.841,54.61 ; 251.502,5.588 252.095,5.588 ; 251.502,10.414 252.349,10.414 ; 251.502,17.78 255.397,17.78 ; 251.756,10.668 252.349,10.668 ; 251.756,18.034 255.397,18.034 ; 251.756,51.562 251.841,51.562 ; 251.756,54.356 252.349,54.356 ; 252.01,5.842 252.603,5.842 ; 252.01,18.288 255.651,18.288 ; 252.264,10.16 252.603,10.16 ; 252.264,10.922 252.603,10.922 ; 252.264,18.542 255.905,18.542 ; 252.264,54.102 252.857,54.102 ; 252.518,6.096 253.111,6.096 ; 252.518,9.652 252.857,9.652 ; 252.518,9.906 252.857,9.906 ; 252.518,11.176 253.111,11.176 ; 252.518,18.796 255.905,18.796 ; 252.772,9.398 253.111,9.398 ; 252.772,19.05 256.159,19.05 ; 252.772,19.304 256.413,19.304 ; 252.772,53.848 253.365,53.848 ; 253.026,6.35 253.365,6.35 ; 253.026,9.144 253.365,9.144 ; 253.026,11.43 253.111,11.43 ; 253.026,19.558 256.413,19.558 ; 253.026,38.354 257.683,38.354 ; 253.28,6.604 253.873,6.604 ; 253.28,8.636 253.619,8.636 ; 253.28,8.89 253.365,8.89 ; 253.28,19.812 256.667,19.812 ; 253.28,53.594 253.619,53.594 ; 253.534,8.128 253.873,8.128 ; 253.534,8.382 253.873,8.382 ; 253.534,11.938 253.873,11.938 ; 253.534,20.066 256.667,20.066 ; 253.534,53.34 254.127,53.34 ; 253.788,6.858 254.127,6.858 ; 253.788,11.684 254.127,11.684 ; 253.788,12.192 254.127,12.192 ; 253.788,20.32 256.921,20.32 ; 253.788,20.574 256.921,20.574 ; 254.042,7.112 254.635,7.112 ; 254.042,11.43 254.381,11.43 ; 254.042,12.446 254.381,12.446 ; 254.042,20.828 257.175,20.828 ; 254.042,38.1 257.683,38.1 ; 254.042,44.45 254.889,44.45 ; 254.042,44.704 255.143,44.704 ; 254.042,44.958 254.127,44.958 ; 254.042,53.086 254.381,53.086 ; 254.296,11.176 255.143,11.176 ; 254.296,12.7 254.635,12.7 ; 254.296,21.082 257.175,21.082 ; 254.296,44.196 254.381,44.196 ; 254.296,46.228 255.651,46.228 ; 254.296,46.482 255.143,46.482 ; 254.296,46.736 254.635,46.736 ; 254.296,52.832 254.889,52.832 ; 254.55,7.366 254.889,7.366 ; 254.55,10.922 254.889,10.922 ; 254.55,12.954 254.889,12.954 ; 254.55,21.336 257.429,21.336 ; 254.55,21.59 257.429,21.59 ; 254.804,7.62 255.397,7.62 ; 254.804,10.414 255.397,10.414 ; 254.804,10.668 255.143,10.668 ; 254.804,13.208 255.143,13.208 ; 254.804,21.844 257.683,21.844 ; 254.804,37.846 257.683,37.846 ; 254.804,52.578 255.143,52.578 ; 255.058,10.16 255.397,10.16 ; 255.058,11.43 255.397,11.43 ; 255.058,13.462 255.397,13.462 ; 255.058,22.098 257.683,22.098 ; 255.058,22.352 257.937,22.352 ; 255.058,44.958 255.651,44.958 ; 255.058,52.324 255.397,52.324 ; 255.312,7.874 255.651,7.874 ; 255.312,9.906 256.159,9.906 ; 255.312,11.684 255.651,11.684 ; 255.312,22.606 257.937,22.606 ; 255.312,22.86 257.937,22.86 ; 255.312,37.592 257.937,37.592 ; 255.312,45.974 255.905,45.974 ; 255.312,52.07 255.905,52.07 ; 255.566,8.128 255.905,8.128 ; 255.566,9.652 255.905,9.652 ; 255.566,11.938 255.905,11.938 ; 255.566,23.114 258.191,23.114 ; 255.566,23.368 258.191,23.368 ; 255.566,37.338 257.937,37.338 ; 255.566,45.212 255.905,45.212 ; 255.82,8.382 256.159,8.382 ; 255.82,12.192 256.159,12.192 ; 255.82,23.622 258.191,23.622 ; 255.82,23.876 258.445,23.876 ; 255.82,37.084 258.191,37.084 ; 255.82,45.466 257.175,45.466 ; 255.82,51.816 256.159,51.816 ; 256.074,8.636 256.413,8.636 ; 256.074,10.16 256.413,10.16 ; 256.074,13.462 256.413,13.462 ; 256.074,13.716 256.413,13.716 ; 256.074,13.97 256.159,13.97 ; 256.074,14.224 256.159,14.224 ; 256.074,14.478 256.159,14.478 ; 256.074,14.732 256.413,14.732 ; 256.074,24.13 258.445,24.13 ; 256.074,24.384 258.445,24.384 ; 256.074,36.83 258.191,36.83 ; 256.074,45.72 256.667,45.72 ; 256.074,51.562 256.413,51.562 ; 256.328,10.414 256.667,10.414 ; 256.328,13.208 256.667,13.208 ; 256.328,14.986 256.413,14.986 ; 256.328,24.638 258.699,24.638 ; 256.328,24.892 258.699,24.892 ; 256.328,36.576 258.191,36.576 ; 256.328,51.308 256.667,51.308 ; 256.582,8.89 256.921,8.89 ; 256.582,10.668 256.921,10.668 ; 256.582,12.954 256.921,12.954 ; 256.582,15.24 256.921,15.24 ; 256.582,25.146 258.699,25.146 ; 256.582,25.4 258.699,25.4 ; 256.582,36.322 258.445,36.322 ; 256.582,44.704 256.921,44.704 ; 256.582,44.958 257.175,44.958 ; 256.582,46.482 257.175,46.482 ; 256.582,46.736 256.667,46.736 ; 256.582,51.054 257.175,51.054 ; 256.836,9.144 257.175,9.144 ; 256.836,10.922 257.175,10.922 ; 256.836,12.7 257.429,12.7 ; 256.836,15.494 257.937,15.494 ; 256.836,25.654 258.699,25.654 ; 256.836,25.908 258.953,25.908 ; 256.836,26.162 258.953,26.162 ; 256.836,35.814 258.445,35.814 ; 256.836,36.068 258.445,36.068 ; 256.836,45.212 257.175,45.212 ; 256.836,47.498 257.937,47.498 ; 256.836,50.8 257.429,50.8 ; 257.09,9.398 257.429,9.398 ; 257.09,11.176 257.429,11.176 ; 257.09,12.446 258.445,12.446 ; 257.09,26.416 258.953,26.416 ; 257.09,26.67 258.953,26.67 ; 257.09,26.924 258.953,26.924 ; 257.09,35.306 258.699,35.306 ; 257.09,35.56 258.445,35.56 ; 257.09,45.72 257.937,45.72 ; 257.09,46.228 257.429,46.228 ; 257.09,47.752 257.937,47.752 ; 257.344,9.652 257.683,9.652 ; 257.344,27.178 259.207,27.178 ; 257.344,27.432 259.207,27.432 ; 257.344,27.686 259.207,27.686 ; 257.344,27.94 259.207,27.94 ; 257.344,34.544 258.699,34.544 ; 257.344,34.798 258.699,34.798 ; 257.344,35.052 258.699,35.052 ; 257.344,45.974 257.937,45.974 ; 257.344,47.244 257.429,47.244 ; 257.344,48.006 257.683,48.006 ; 257.344,48.26 257.683,48.26 ; 257.344,50.546 257.683,50.546 ; 257.598,9.906 257.937,9.906 ; 257.598,15.24 257.683,15.24 ; 257.598,28.194 259.207,28.194 ; 257.598,28.448 259.207,28.448 ; 257.598,28.702 259.207,28.702 ; 257.598,28.956 259.207,28.956 ; 257.598,29.21 259.207,29.21 ; 257.598,33.528 258.953,33.528 ; 257.598,33.782 258.953,33.782 ; 257.598,34.036 258.953,34.036 ; 257.598,34.29 258.953,34.29 ; 257.598,45.466 257.937,45.466 ; 257.598,46.736 257.937,46.736 ; 257.598,48.514 257.683,48.514 ; 257.598,50.292 257.937,50.292 ; 257.852,10.16 258.191,10.16 ; 257.852,16.51 258.191,16.51 ; 257.852,29.464 259.207,29.464 ; 257.852,29.718 259.207,29.718 ; 257.852,29.972 259.207,29.972 ; 257.852,30.226 259.207,30.226 ; 257.852,30.48 259.207,30.48 ; 257.852,30.734 259.207,30.734 ; 257.852,30.988 259.207,30.988 ; 257.852,31.242 259.207,31.242 ; 257.852,31.496 259.207,31.496 ; 257.852,31.75 259.207,31.75 ; 257.852,32.004 259.207,32.004 ; 257.852,32.258 259.207,32.258 ; 257.852,32.512 259.207,32.512 ; 257.852,32.766 259.207,32.766 ; 257.852,33.02 259.207,33.02 ; 257.852,33.274 258.953,33.274 ; 257.852,46.482 258.191,46.482 ; 257.852,46.99 259.207,46.99 ; 257.852,50.038 258.191,50.038 ; 258.106,10.414 258.445,10.414 ; 258.106,16.256 258.699,16.256 ; 258.106,48.006 258.191,48.006 ; 258.106,48.26 258.191,48.26 ; 258.106,48.514 258.445,48.514 ; 258.106,49.784 258.445,49.784 ; 258.36,10.668 258.699,10.668 ; 258.36,12.7 258.699,12.7 ; 258.36,16.002 259.461,16.002 ; 258.36,46.736 258.699,46.736 ; 258.36,47.244 259.461,47.244 ; 258.36,47.498 259.461,47.498 ; 258.36,48.768 258.445,48.768 ; 258.36,49.53 258.699,49.53 ; 258.614,10.922 258.953,10.922 ; 258.614,12.954 258.953,12.954 ; 258.614,45.974 259.969,45.974 ; 258.614,47.752 258.953,47.752 ; 258.614,49.276 258.953,49.276 ; 258.868,11.176 259.207,11.176 ; 258.868,13.208 258.953,13.208 ; 258.868,13.462 259.207,13.462 ; 258.868,13.716 259.207,13.716 ; 258.868,13.97 259.207,13.97 ; 258.868,14.224 258.953,14.224 ; 258.868,15.748 259.461,15.748 ; 258.868,48.006 258.953,48.006 ; 258.868,49.022 259.207,49.022 ; 259.122,11.43 259.461,11.43 ; 259.122,18.288 259.461,18.288 ; 259.122,18.542 259.207,18.542 ; 259.122,45.72 259.715,45.72 ; 259.122,46.736 259.461,46.736 ; 259.122,48.768 259.461,48.768 ; 259.376,11.684 259.715,11.684 ; 259.376,15.494 259.969,15.494 ; 259.376,16.256 259.715,16.256 ; 259.376,18.034 259.969,18.034 ; 259.376,46.228 259.969,46.228 ; 259.376,46.482 259.969,46.482 ; 259.376,48.26 259.715,48.26 ; 259.376,48.514 259.715,48.514 ; 259.63,11.938 259.969,11.938 ; 259.63,16.51 259.715,16.51 ; 259.63,16.764 259.969,16.764 ; 259.63,19.812 260.477,19.812 ; 259.63,20.066 262.509,20.066 ; 259.63,48.006 259.969,48.006 ; 259.884,12.192 260.223,12.192 ; 259.884,12.446 260.223,12.446 ; 259.884,15.24 260.477,15.24 ; 259.884,17.018 259.969,17.018 ; 259.884,17.272 260.223,17.272 ; 259.884,17.78 260.477,17.78 ; 259.884,47.752 260.223,47.752 ; 260.138,12.7 260.477,12.7 ; 260.138,17.526 260.985,17.526 ; 260.138,19.558 260.731,19.558 ; 260.138,47.498 260.477,47.498 ; 260.392,12.954 260.731,12.954 ; 260.392,14.986 260.731,14.986 ; 260.392,19.304 261.239,19.304 ; 260.392,47.244 260.731,47.244 ; 260.646,13.208 260.731,13.208 ; 260.646,21.844 261.239,21.844 ; 260.646,46.99 260.731,46.99 ; 260.9,13.462 260.985,13.462 ; 260.9,13.716 261.239,13.716 ; 260.9,17.272 261.493,17.272 ; 260.9,19.05 261.747,19.05 ; 260.9,21.59 261.747,21.59 ; 260.9,34.544 260.985,34.544 ; 260.9,34.798 261.239,34.798 ; 260.9,37.084 261.239,37.084 ; 260.9,46.482 261.239,46.482 ; 260.9,46.736 260.985,46.736 ; 261.154,13.97 261.493,13.97 ; 261.154,17.018 261.747,17.018 ; 261.154,23.114 261.493,23.114 ; 261.154,23.368 261.493,23.368 ; 261.154,23.622 261.493,23.622 ; 261.154,35.052 261.747,35.052 ; 261.154,36.83 261.493,36.83 ; 261.154,46.228 261.493,46.228 ; 261.408,14.224 261.493,14.224 ; 261.408,14.478 261.747,14.478 ; 261.408,18.796 262.001,18.796 ; 261.408,20.32 263.525,20.32 ; 261.408,21.336 262.255,21.336 ; 261.408,22.606 261.747,22.606 ; 261.408,22.86 261.493,22.86 ; 261.408,23.876 261.493,23.876 ; 261.408,24.13 261.747,24.13 ; 261.408,25.654 264.541,25.654 ; 261.408,25.908 264.795,25.908 ; 261.408,32.258 261.747,32.258 ; 261.408,32.512 261.493,32.512 ; 261.408,32.766 261.493,32.766 ; 261.408,33.02 261.493,33.02 ; 261.408,33.274 261.493,33.274 ; 261.408,33.528 261.747,33.528 ; 261.408,36.576 262.001,36.576 ; 261.408,45.72 261.747,45.72 ; 261.408,45.974 261.493,45.974 ; 261.662,14.732 262.001,14.732 ; 261.662,16.764 261.747,16.764 ; 261.662,22.352 262.001,22.352 ; 261.662,24.384 262.001,24.384 ; 261.662,29.21 262.001,29.21 ; 261.662,31.75 262.255,31.75 ; 261.662,32.004 261.747,32.004 ; 261.662,33.782 261.747,33.782 ; 261.662,34.036 262.255,34.036 ; 261.662,35.306 262.001,35.306 ; 261.662,45.466 262.001,45.466 ; 261.916,14.986 262.255,14.986 ; 261.916,18.542 262.509,18.542 ; 261.916,21.082 262.509,21.082 ; 261.916,22.098 264.033,22.098 ; 261.916,24.638 263.779,24.638 ; 261.916,28.448 262.255,28.448 ; 261.916,28.702 262.001,28.702 ; 261.916,28.956 262.001,28.956 ; 261.916,29.464 262.001,29.464 ; 261.916,29.718 262.001,29.718 ; 261.916,29.972 262.255,29.972 ; 261.916,35.56 262.509,35.56 ; 261.916,36.322 262.255,36.322 ; 261.916,44.958 262.255,44.958 ; 261.916,45.212 262.001,45.212 ; 262.17,15.24 262.255,15.24 ; 262.17,15.494 262.509,15.494 ; 262.17,24.892 263.271,24.892 ; 262.17,28.194 262.509,28.194 ; 262.17,30.226 262.509,30.226 ; 262.17,31.496 264.033,31.496 ; 262.17,44.704 262.509,44.704 ; 262.424,15.748 262.509,15.748 ; 262.424,16.002 262.763,16.002 ; 262.424,18.288 262.509,18.288 ; 262.424,20.828 263.017,20.828 ; 262.424,21.844 263.525,21.844 ; 262.424,27.94 264.287,27.94 ; 262.424,30.48 264.541,30.48 ; 262.424,35.814 264.033,35.814 ; 262.424,36.068 264.033,36.068 ; 262.424,44.196 262.763,44.196 ; 262.424,44.45 262.509,44.45 ; 262.678,16.256 263.017,16.256 ; 262.678,43.688 263.017,43.688 ; 262.678,43.942 262.763,43.942 ; 262.932,16.51 263.017,16.51 ; 262.932,16.764 263.271,16.764 ; 262.932,20.574 263.525,20.574 ; 262.932,27.686 263.779,27.686 ; 262.932,30.734 264.033,30.734 ; 262.932,31.242 263.017,31.242 ; 262.932,33.274 263.271,33.274 ; 262.932,33.528 263.271,33.528 ; 262.932,33.782 263.271,33.782 ; 262.932,34.036 264.287,34.036 ; 262.932,43.18 263.271,43.18 ; 262.932,43.434 263.271,43.434 ; 263.186,17.018 263.271,17.018 ; 263.186,17.272 263.525,17.272 ; 263.186,33.02 263.271,33.02 ; 263.186,34.29 264.033,34.29 ; 263.186,42.672 263.525,42.672 ; 263.186,42.926 263.525,42.926 ; 263.44,17.526 263.525,17.526 ; 263.44,17.78 263.779,17.78 ; 263.44,42.164 263.779,42.164 ; 263.44,42.418 263.525,42.418 ; 263.694,18.034 263.779,18.034 ; 263.694,18.288 264.033,18.288 ; 263.694,24.384 264.287,24.384 ; 263.694,31.75 264.287,31.75 ; 263.694,41.656 264.033,41.656 ; 263.694,41.91 264.033,41.91 ; 263.948,18.542 264.033,18.542 ; 263.948,18.796 264.287,18.796 ; 263.948,19.05 264.287,19.05 ; 263.948,22.352 264.287,22.352